# Altium PCB PCB2.PcbDoc
Units mm, origin at the board's own origin, x right, y up, seen from the top; angles counter-clockwise.
Board outline 37.97 x 37.85 mm, 2 copper layers (Top Layer, Bottom Layer); 16 components, 13 nets, 42 pads, 1 vias.
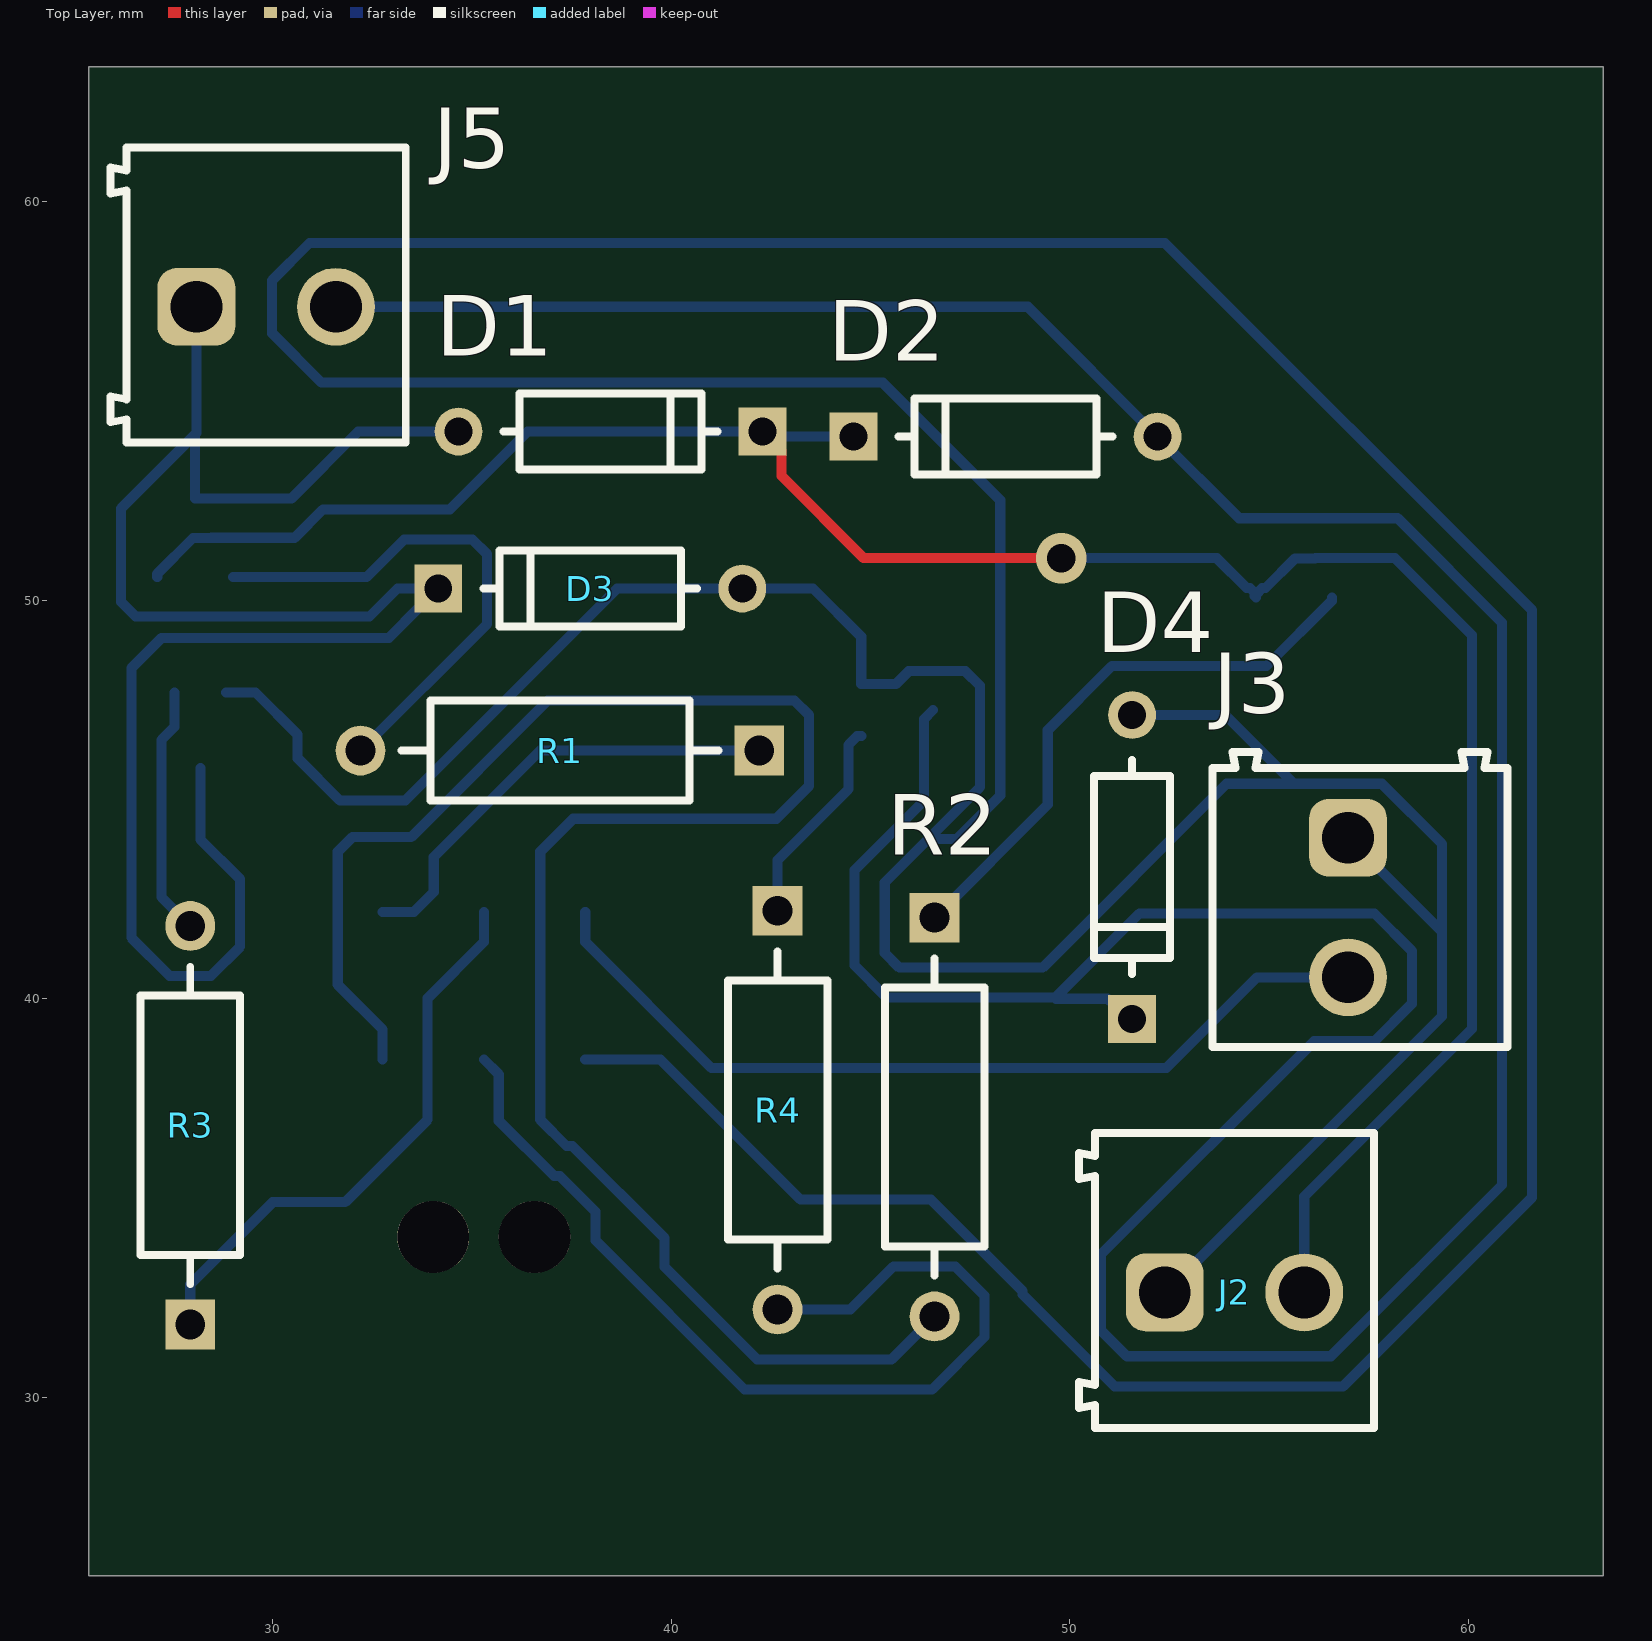
[diagram p0: Top Layer view]
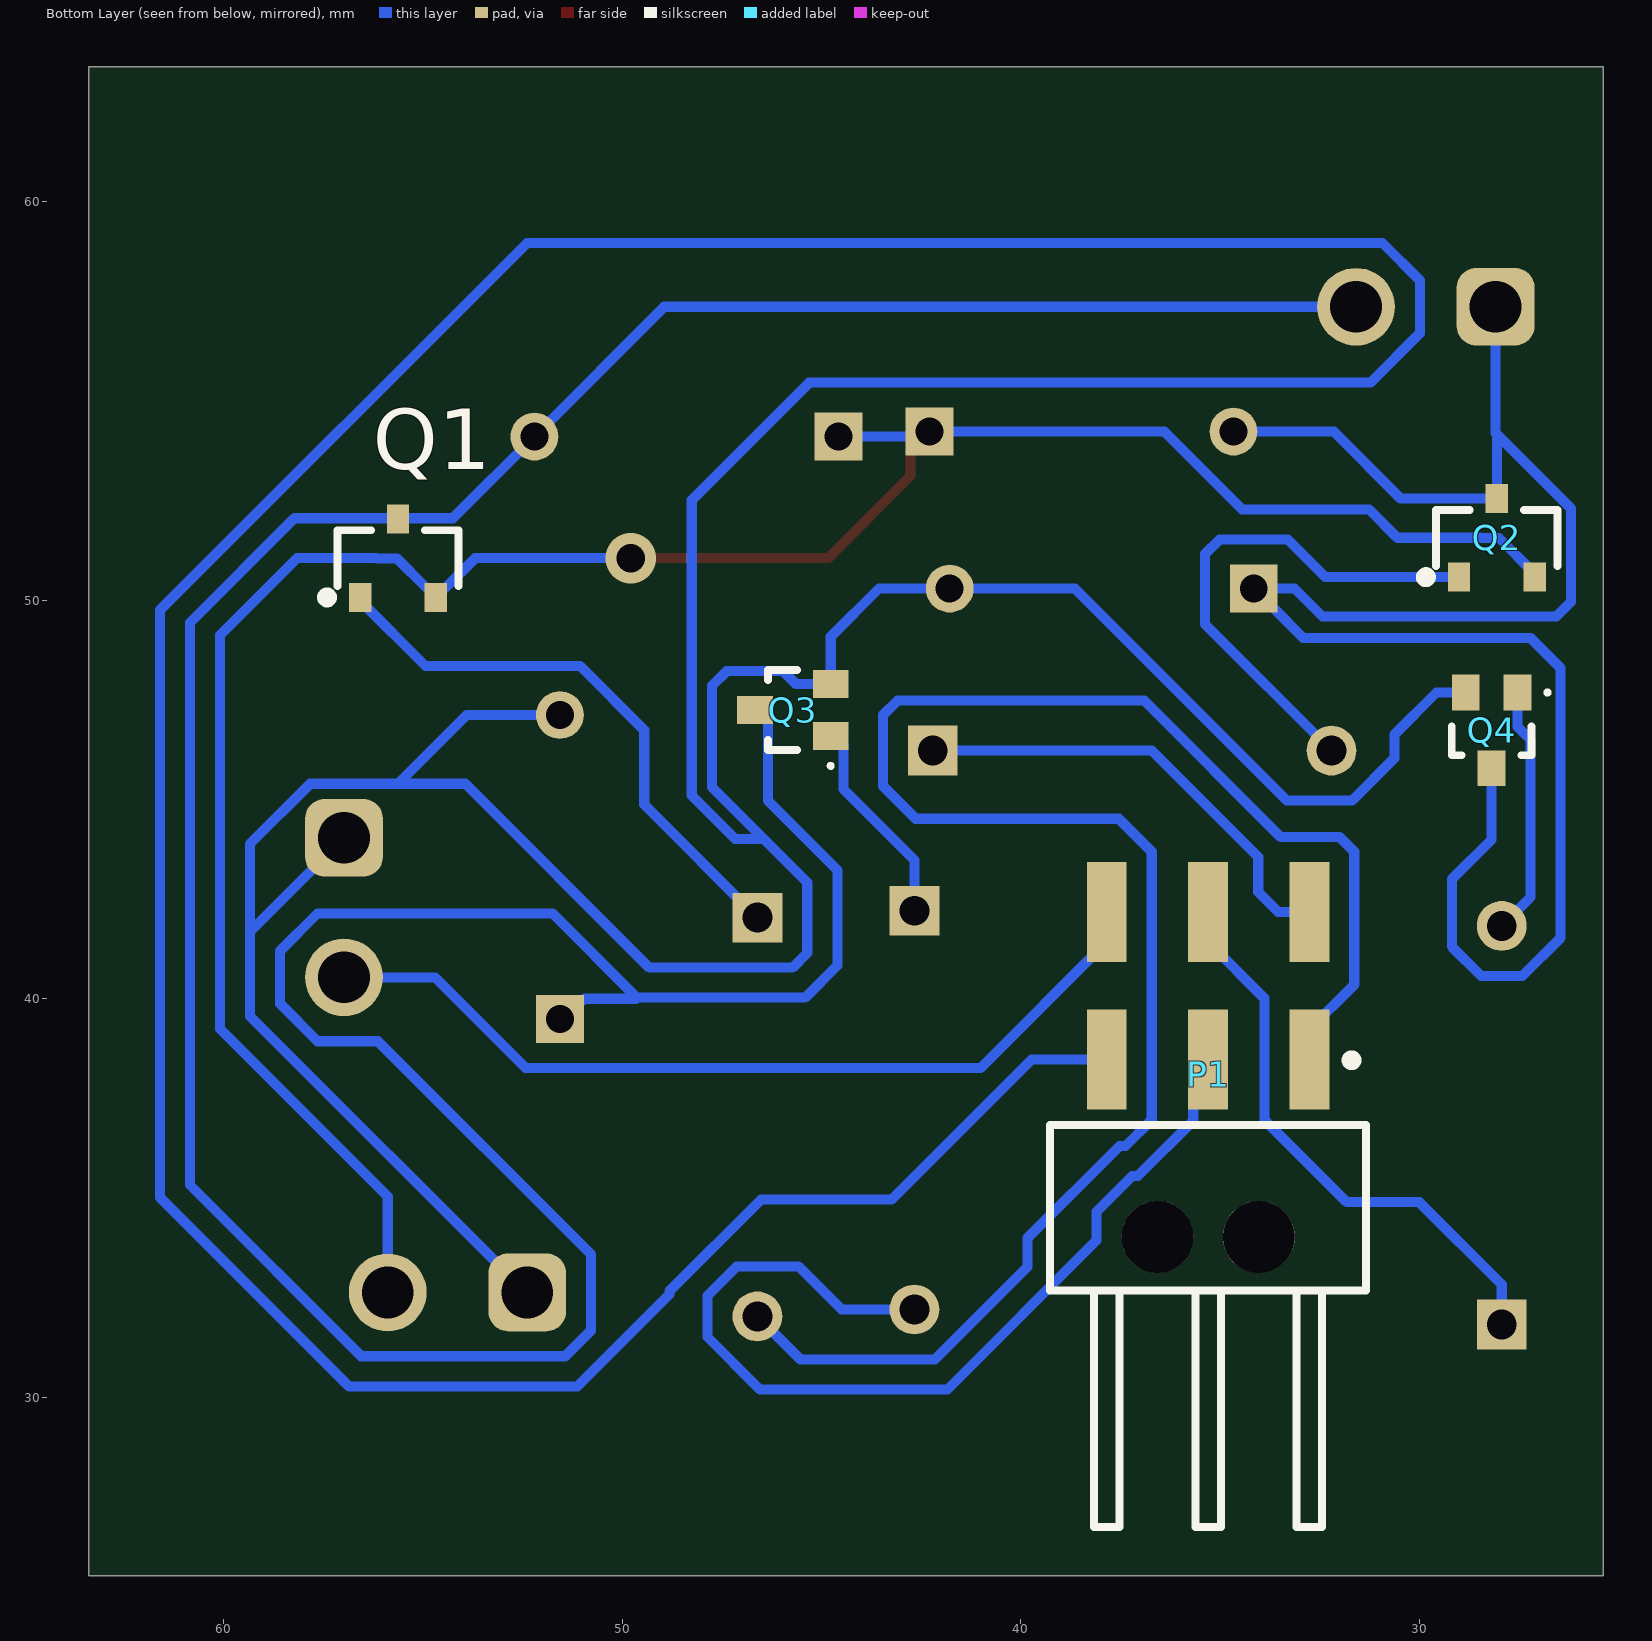
[diagram p1: Bottom Layer view, seen from below]
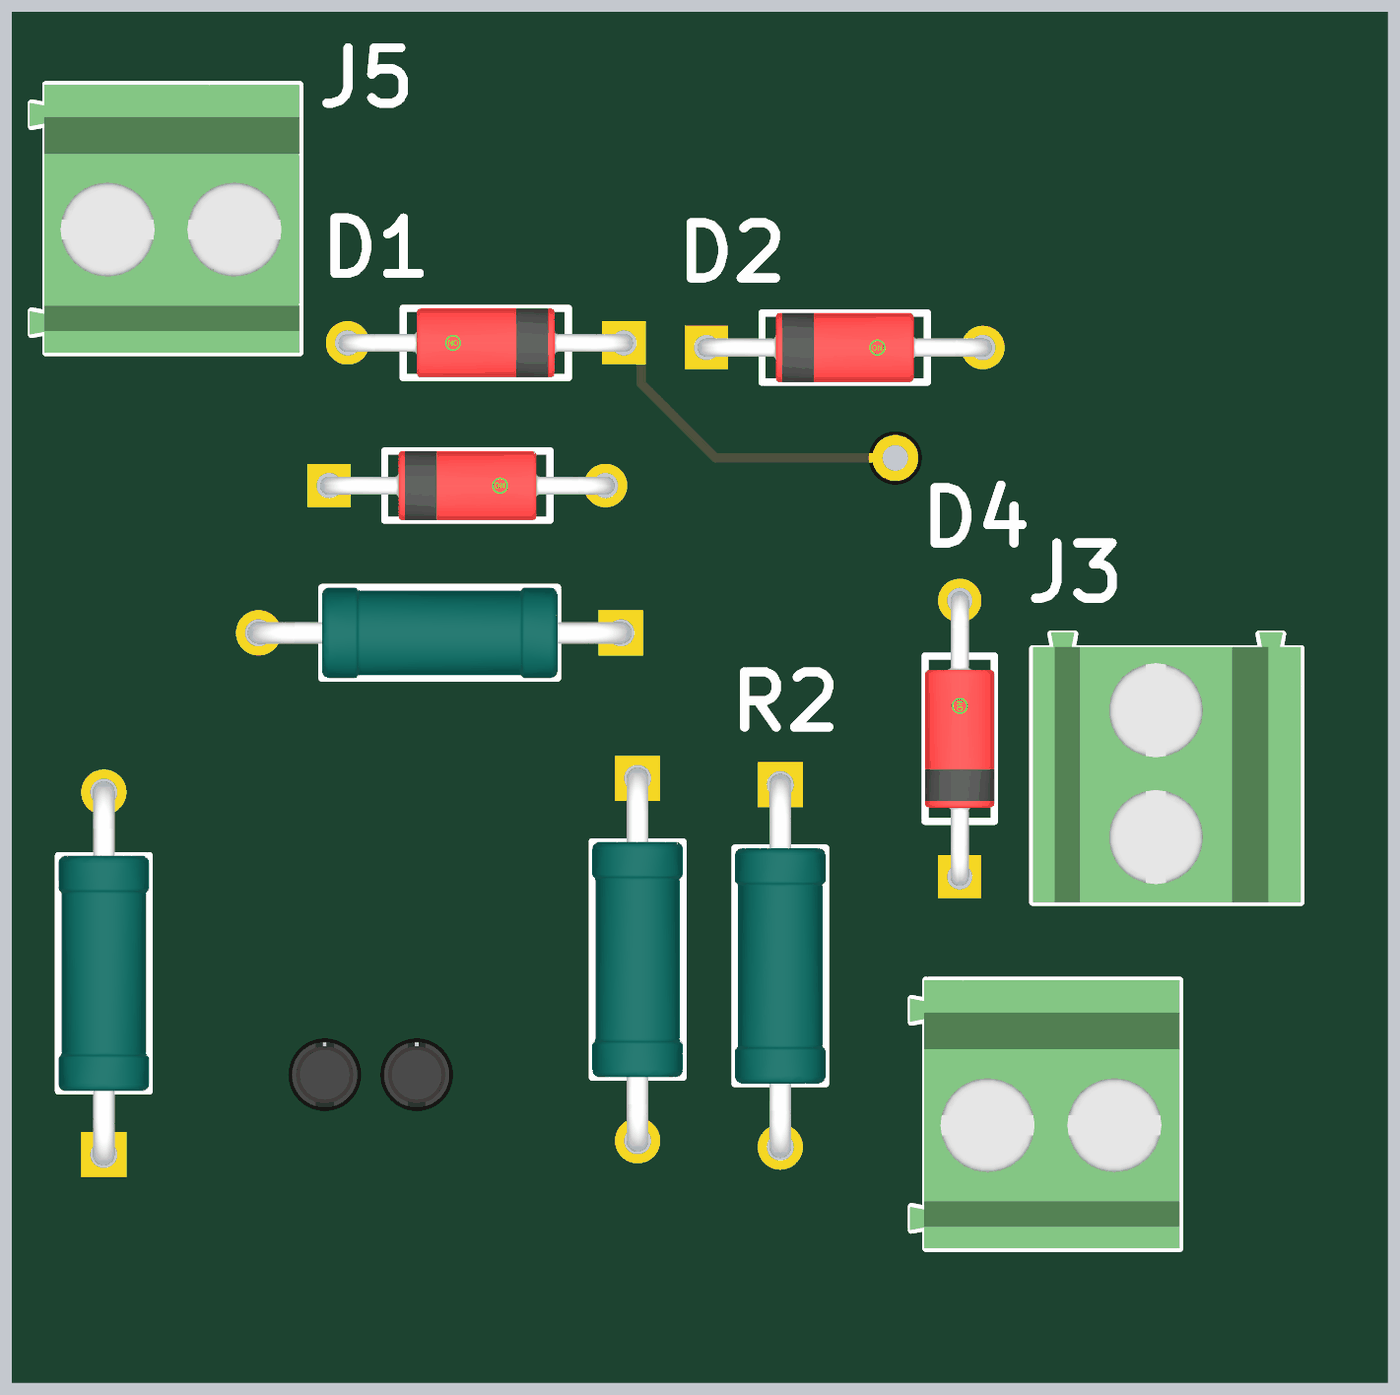
[diagram p2: 3D render of the assembled board from above, using the file's embedded part models]

## Layer stack, top to bottom
Top Solder: solder mask 0.0102, Solder Resist, Dk 3.5
Top Layer: signal copper 0.0356
Dielectric 1: dielectric 0.32, FR-4, Dk 4.8
Bottom Layer: signal copper 0.0356
Bottom Solder: solder mask 0.0102, Solder Resist, Dk 3.5

## Board outline
25.4,25.527 63.373,25.527 63.373,63.373 25.4,63.373

## Design rules (kind name [scope] priority, off if disabled: settings)
Clearance [All] p1: gap=0.5 ignorepadtopadclearanceinfootprint=FALSE except(0: SMDPad-Hole THPad-Hole Via-Hole Fill-Hole Poly-Hole Region-Hole Text-Hole; 0.254: Via-Fill Via-Poly Via-Region)
PolygonConnect [All] p1: connectstyle=Relief reliefconductorwidth=0.254 reliefentries=4 polygonreliefangle="90 Angle" airgapwidth=0.254
RoutingVias [All] p1: holewidth=0.711 width=1.27 viastyle="Through Hole" minholewidth=0.711 minwidth=1.27 maxholewidth=0.711 maxwidth=1.27
SolderMaskExpansion [All] p1: expansion=0.102 istentingtop=FALSE
Width [All] p1: maxlimit=0.5 minlimit=0.254 preferedwidth=0.254 minimp=50.000000 maximp=50.000000 favimp=50.000000
30 further rules are at their usual default settings.

## Components (designator, comment, footprint, x,y, rotation, side; value= is the part's Value field where it differs from the comment)
D1 "1N4148" FP-017AG-MFG 38.481,54.229 r180 top
D2 "1N4148" FP-017AG-MFG 48.387,54.102 r0 top
D3 "1N4148" FP-017AG-MFG 37.973,50.292 r0 top
D4 "1N4148" FP-017AG-MFG 51.562,43.307 r90 top
J2 "691214110002" 691214110002 54.13,32.939 r0 top
J3 "691214110002" 691214110002 57.277,42.291 r270 top
J5 "691214110002" 691214110002 29.845,57.658 r0 top
P1 "610106249121" 610106249121 35.306,34.761 r180 bottom
Q1 "SI2323DS-T1-E3" VISH-SI2323DS-T1-E3-3_V 55.622,51.054 r90 bottom
Q2 "SI2323DS-T1-E3" VISH-SI2323DS-T1-E3-3_V 28.063,51.562 r90 bottom
Q3 "2N7002WT1G" ONSC-SC-70-3-419-04_V 45.72,47.244 r0 bottom
Q4 "2N7002WT1G" ONSC-SC-70-3-419-04_V 28.194,46.736 r270 bottom
R1 "MRS25000C1000FRP00" FP-MRS25-MFG 37.211,46.228 r180 top
R2 "MRS25000C1000FRP00" FP-MRS25-MFG 46.609,37.037 r270 top
R3 "MRS25000C1000FRP00" FP-MRS25-MFG 27.94,36.83 r90 top
R4 "MRS25000C1000FRP00" FP-MRS25-MFG 42.672,37.211 r270 top

## Footprints (in the part's own frame and the unit in brackets; to place one, negate y for a bottom-side part, rotate by r counter-clockwise, add the part's x,y. Pads: shape width x height; smd on the part's side, far side on the other; paste and mask are expansions set on the pad)
610106249121 [mm] "Pin Header, pitch 2.54 mm, SMD, Angled, dual row, 6p"
  rect 1x2.5 smd: 1(2.54,3.72) 2(2.54,7.42) 3(0,3.72) 4(0,7.42) 5(-2.54,3.72) 6(-2.54,7.42)
  round 1.8 hole 1.8 unplated: MH1(1.27,-0.73) MH2(-1.27,-0.73)
  silkscreen extent -3.96,-8 3.96,3.82, body extent -3.81,-8 3.81,8.16, height 5.1
691214110002 [mm] "3.50 mm Horizontal Entry Modular, 2p"
  rrect50% 1.95x1.95 hole 1.3: 1(-1.75,-0.3)
  round 1.95 hole 1.3: 2(1.75,-0.3)
  silkscreen extent -3.9,-3.7 3.5,3.7, body extent -3.95,-3.7 3.5,3.7, height 8.55
FP-017AG-MFG [mm]
  rect 1.2x1.2 hole 0.7 paste-1000 mask+0: 1(-3.813,0)
  round 1.2 hole 0.7 paste-1000 mask+0: 2(3.813,0)
  silkscreen extent -2.68,-0.95 2.68,0.95, body extent -4.51,-1.05 4.51,1.05, height 0.25
FP-MRS25-MFG [mm]
  rect 1.25x1.25 hole 0.75 paste-1000 mask+0: 1(-5,0)
  round 1.25 hole 0.75 paste-1000 mask+0: 2(5,0)
  silkscreen extent -3.98,-1.25 3.98,1.25, body extent -5.72,-1.35 5.72,1.35, height 0.25
ONSC-SC-70-3-419-04_V [mm] "SOT23, 3-Leads, Body 2x1.25mm, Pitch 0.65mm"
  rect 0.9x0.7 smd: 1(-0.95,0.65) 2(-0.95,-0.65) 3(0.95,0)
  silkscreen extent -1,-1 0.63,1.45, body extent -0.63,-1 0.63,1, height 1
VISH-SI2323DS-T1-E3-3_V [mm] "SOT23, 3-Leads, Body 3.04x1.4mm, Pitch 0.95mm"
  rect 0.724x0.559 smd: 1(-0.984,0.95) 2(-0.984,-0.95) 3(0.985,0)
  silkscreen extent -1.11,-1.52 0.7,1.9, body extent -0.7,-1.52 0.7,1.52, height 1.12

## Part data
D1 D2 D3 D4: library part CMP-07163-000046-1, "DIODE GEN PURP 100V 200MA DO35", Average Rectified Current=200mA, Capacitance=4pF, Case/Package=DO-35, Current=4A, Forward Current=300mA, Forward Voltage=1V, Max Forward Surge Current (Ifsm)=1A, Max Operating Temperature=175°C, Max Power Dissipation=500mW, Max Repetitive Reverse Voltage (Vrrm)=100V, Max Reverse Current=5uA, Min Operating Temperature=-65°C, Package Quantity=2000, Contact Plating=Tin, Current Rating=200mA, Diameter=1.91mm, Element Configuration=Single, Height=4.56mm, Lead Free="Lead Free", Length=4.56mm, Max Reverse Voltage (DC)=100V, Max Surge Current=4A, Mount="Through Hole", Number of Pins=2, Output Current=200mA, Outside Diameter=1.85mm, Packaging=Bulk, Peak Non-Repetitive Surge Current=4A, Polarity=Standard, Power Dissipation=500mW, Radiation Hardening=No, REACH SVHC="No SVHC", Recovery Time=4ns, Reverse Recovery Time=4ns, Reverse Voltage=100V, Series=-, Voltage=100V, Voltage Rating (DC)=100V, Weight=0.01lb, Width=1.91mm
J2 J3 J5: library part CMP-1502-02464-2, Color="Blue, Green", Current=10A, Max Operating Temperature=105°C, Min Operating Temperature=-40°C, Voltage=300V, Contact Material=Brass, Contact Plating="Brass, Tin", Current Rating=10A, Height=8.7mm, Housing Material=Nylon, Lead Pitch=3.5mm, Length=7.4mm, Mount="Through Hole", NexarPartId=18818288, Number of Contacts=2, Number of Levels=1, Number of Pins=2, Number of Positions Per Level=2, Number of Rows=1, Packaging=Box, Pitch=3.5052mm, Plating="Brass, Steel", REACH SVHC=Unknown, RoHS=Compliant, Stripping Length=-6mm, Termination=Screw, Voltage Rating=300V, Width=7.9mm, Wire Gauge (Max)=24AWG, Wire Gauge (Min)=16AWG, Wire/Cable Gauge=24AWG
P1: library part CMP-1502-01146-3, Color=Black, Contact Resistance=20mΩ, Current Rating=3A, Operating Supply Voltage=250V, Connector Type="Male Pin", Contact Mating Length=5.9944mm, Contact Plating=Gold, Gender=Male, Lead Pitch=2.54mm, Mount="Surface Mount", NexarPartId=52645089, Number of Contacts=6, Number of Pins=6, Number of Positions=6, Number of Rows=2, Packaging="Tape and Reel", Pitch=2.54mm, REACH SVHC=Unknown, RoHS=Compliant, Row Spacing=2.54mm, Termination=Solder
Q1 Q2: library part CMP-2000-07054-1, "P-Channel MOSFET, 20 V, -55 to 150 degC, 3-Pin TO-236, RoHS, Tape and Reel", Id - Continuous Drain Current=3.7A, Manufacturer=Vishay, Maximum Operating Temperature=+150C, Minimum Operating Temperature=-55C, Package / Case=SOT-23-3, Package Description="3-Pin Plastic Small Outline, Body 2.92 x1.3 mm, Pitch 0.95 mm", Package Reference=TO-236-3, Pd - Power Dissipation=750mW, Rds On - Drain-Source Resistance=39mOhms, Vds - Drain-Source Breakdown Voltage=-20V, Vgs - Gate-Source Voltage=8V, Brand=VishaySemiconductors, Channel Mode=Enhancement, Configuration=Single, Datasheet URL=https://datasheet.ciiva.com/15137/getdatasheetpartid-75162-15137380.pdf, Datasheet Version="Rev. D, 02/2009", Factory Pack Quantity=3000, Fall Time=43ns, Height=1.02mm, Length=3.04mm, Manufacturer URL=http://www.vishay.com/, Mounting Style=SMD/SMT, Mounting Technology=SurfaceMount, Number Of Channels=1Channel, Package URL=https://www.vishay.com/docs/71196/71196.pdf, Packaging=Reel, Product=MOSFETSmallSignal, Product Category=MOSFET, Rise Time=43ns, RoHS=True, Series=SI2, Technology=Si, Tradename=TrenchFET, Transistor Polarity=P-Channel, Transistor Type=1P-Channel, Typical Turn-Off Delay Time=71ns, Typical Turn-On Delay Time=25ns, Unit Weight=0.050717oz, Width=1.4mm
Q3 Q4: library part CMP-1058-00618-1, "Small Signal MOSFET, 60 V, 340 mA, Single, N-Channel, 3-Pin SC70, Pb-Free, Tape and Reel", Manufacturer="On Semiconductor", Package Type="SC-70-3 / SOT-323-3", Channel Polarity="N Channel", Ciss Typ (pF)=24.5, ComponentLink1Description="Manufacturer URL", ComponentLink1URL=http://www.onsemi.com/, ComponentLink2Description=Datasheet, ComponentLink2URL=http://www.onsemi.com/pub_link/Collateral/2N7002W-D.PDF, ComponentLink3Description="Package Specification", ComponentLink3URL=http://www.onsemi.cn/pub_link/Collateral/419-04.PDF, Configuration=Single, Coss Typ (pF)=4.2, Crss Typ (pF)=2.2, DatasheetVersion="Rev. 5", ID Max (A)=0.34, Mounting Technology="Surface Mount", PackageDescription="3-Pin Small Outline Transistor, Body 2 x 1.25 mm, Pitch 0.65 mm", PackageReference=SC-70-3-419-04, PackageVersion="Rev. N, 11/2008", Packing="Tape and Reel", PartNumber=2N7002WT1G, RoHS=Pb-Free, V(BR)DSS Min (V)=60, VGS Max (V)=20, VGS(th) Max (V)=2.5
R1 R2 R3 R4: library part CMP-00030-42757237-1, "MRS25000C1000FRP00 Resistor, 100 Ohm, ± 1%, 600 mW, Axial Leaded, Metal Film (Thin Film), Professional", Case/Package=Axial, Max Operating Temperature=155°C, Max Power Dissipation=600mW, Min Operating Temperature=-55°C, Resistance=100Ω, Temperature Coefficient=50ppm/°C, Tolerance=1%, Voltage Rating=350V, Composition="Metal Film, Thin Film", Contact Plating=Tin, Diameter=2.5mm, Lead Diameter=600µm, Lead Free="Lead Free", Length=6.5mm, Military Standard=Not, Mount="Through Hole", NexarPartId=42757237, Number of Pins=2, Number of Terminations=2, Packaging="Tape & Reel (TR)", Power Rating=600mW, Radiation Hardening=No, REACH SVHC=Unknown, RoHS=Compliant, Schedule B="8533210090, 8533210090", Termination=Axial, Voltage Rating (DC)=350V, Width=2.5mm

## Via types
v1: diameter 1.27, hole 0.711, Top Layer to Bottom Layer, 1 vias

## Nets (pads, with @x,y where several pads share a name; then routed paths per layer and width w, separated by ;. In a path a pad name is that pad's centre, name@x,y a point inside that pad or via, vN(x,y) a via of type N, cw(c..) or ccw(c..) an arc to the next point about the centre after c; other vN are vias at no path point)
5V_line: J3.2 P1.6 | length 22.1
  Bottom Layer w0.254: P1.6 37.846,41.431 41.01,38.267 52.422,38.267 54.696,40.541 J3.2
12V_line: D1.1 D2.1 J2.2 Q1.2 Q2.2 | length 58.5
  Top Layer w0.254: D1.1 42.767,53.756 42.767,53.118 44.831,51.054 v1(49.784,51.054)
  Bottom Layer w0.254: Q2.2 27.113,50.66 28.011,51.558 28.465,51.558 28.474,51.567 30.559,51.567 31.266,52.273 34.447,52.273 36.403,54.229 D1.1 42.421,54.102 D2.1 ; v1(49.784,51.054) 53.688,51.054 54.437,50.305 54.52,50.305 Q1.2@54.672,50.152 ; Q1.2@54.631,50.111 Q1.2@54.672,50.152 ; Q1.2 Q1.2@54.672,50.152 ; J2.2 55.88,35.046 60.087,39.253 60.087,49.124 58.153,51.059 56.162,51.059 56.153,51.05 55.652,51.05 54.907,50.305 54.825,50.305 Q1.2@54.672,50.152
GND: D3.2 D4.2 J2.1 J3.1 P1.5 Q3.2 Q4.2 | length 181.8
  Bottom Layer w0.254: Q4.2 29.575,47.686 30.634,46.627 30.634,46.035 31.692,44.976 33.332,44.976 38.648,50.292 D3.2 43.561,50.292 44.77,49.083 Q3.2 45.633,47.894 45.96,48.221 47.38,48.221 47.747,47.854 47.747,45.312 46.447,44.011 ; P1.5 39.73,38.481 43.241,34.97 46.513,34.97 48.816,32.667 48.816,32.586 51.119,30.283 56.856,30.283 61.595,35.022 61.595,49.749 52.384,58.96 30.931,58.96 29.993,58.022 29.993,56.694 31.231,55.456 45.307,55.456 48.255,52.508 48.255,45.101 47.165,44.011 46.447,44.011 ; D4.2 53.898,47.12 55.621,45.397 ; J2.1 52.407,32.639 59.333,39.565 59.333,41.685 ; J3.1 59.333,41.685 ; 46.447,44.011 45.357,42.922 45.357,41.152 45.724,40.785 49.319,40.785 53.931,45.397 55.621,45.397 ; 55.621,45.397 57.824,45.397 59.333,43.888 59.333,41.685
NetD1_2: D1.2 D3.1 J5.1 Q2.3 Q4.3 | length 49.1
  Bottom Layer w0.254: J5.1 28.095,54.191 28.063,54.159 ; Q4.3 28.194,43.998 29.192,43 29.192,41.311 28.459,40.578 27.421,40.578 26.463,41.536 26.463,48.292 27.227,49.055 32.923,49.055 33.687,49.819 D3.1 33.14,50.292 32.436,49.589 26.574,49.589 26.207,49.956 26.207,52.303 28.063,54.159 ; D1.2 32.155,54.229 30.473,52.547 Q2.3 28.063,54.159
NetD2_2: D2.2 D4.1 J5.2 Q1.3 Q3.3 | length 97.3
  Bottom Layer w0.254: J5.2 48.944,57.358 D2.2 54.246,52.056 55.622,52.056 58.222,52.056 60.841,49.436 60.841,35.334 56.544,31.037 51.431,31.037 50.778,31.69 50.778,33.588 56.129,38.939 57.641,38.939 58.579,39.877 58.579,41.205 57.641,42.143 51.743,42.143 49.631,40.031 ; Q3.3@46.57,47.244 46.347,47.021 46.347,44.978 44.603,43.234 44.603,40.84 45.412,40.031 49.631,40.031 ; D4.1 51.089,39.967 50.978,39.967 50.94,40.005 49.657,40.005 49.631,40.031
NetQ1_1: Q1.1 R2.1 | length 14.4
  Bottom Layer w0.254: R2.1 49.447,44.875 49.447,46.74 51.054,48.347 54.932,48.347 56.572,49.987 Q1.1
NetQ2_1: Q2.1 R1.2 | length 13.2
  Bottom Layer w0.254: Q2.1 32.359,50.578 33.3,51.519 35.02,51.519 35.387,51.152 35.387,49.404 R1.2
NetQ3_1: Q3.1 R4.1 | length 5.3
  Bottom Layer w0.254: R4.1 42.672,43.486 44.447,45.261 44.447,46.371 44.67,46.594 Q3.1
NetQ4_1: Q4.1 R3.2 | length 6.3
  Bottom Layer w0.254: Q4.1 27.544,46.823 27.217,46.496 27.217,42.553 R3.2
signal_1: P1.2 R1.1 | length 11.6
  Bottom Layer w0.254: P1.2 33.545,42.181 34.046,42.682 34.046,43.557 36.716,46.228 R1.1
signal_2: P1.4 R3.1 | length 14.5
  Bottom Layer w0.254: R3.1 27.94,32.836 30.008,34.904 31.825,34.904 33.893,36.971 33.893,40.018 35.306,41.431 P1.4
signal_3: P1.3 R4.2 | length 24.6
  Bottom Layer w0.254: P1.3 35.679,38.108 35.679,36.945 37.066,35.558 37.209,35.558 38.103,34.664 38.103,33.943 41.841,30.205 46.548,30.205 47.861,31.518 47.861,32.556 47.128,33.289 45.574,33.289 44.496,32.211 R4.2
signal_4: P1.1 R2.2 | length 48.4
  Bottom Layer w0.254: P1.1 32.766,39.231 31.639,40.358 31.639,43.691 32.006,44.058 33.48,44.058 36.902,47.48 43.096,47.48 43.463,47.113 43.463,45.343 42.637,44.517 37.545,44.517 36.719,43.691 36.719,36.971 37.378,36.312 37.521,36.312 39.837,33.996 39.837,33.275 42.153,30.959 45.531,30.959 R2.2
pads on no net: P1.MH1 P1.MH2